# Altium PCB DashBoard.PcbDoc (part 2 of 2)
Units mm, origin at the board's own origin, x right, y up, seen from the top; angles counter-clockwise.
Board outline 137.91 x 120.93 mm, 2 copper layers (Top Layer, Bottom Layer); 50 components, 83 nets, 335 pads, 92 vias.
Unrouted connection lines stored in the file: 1.
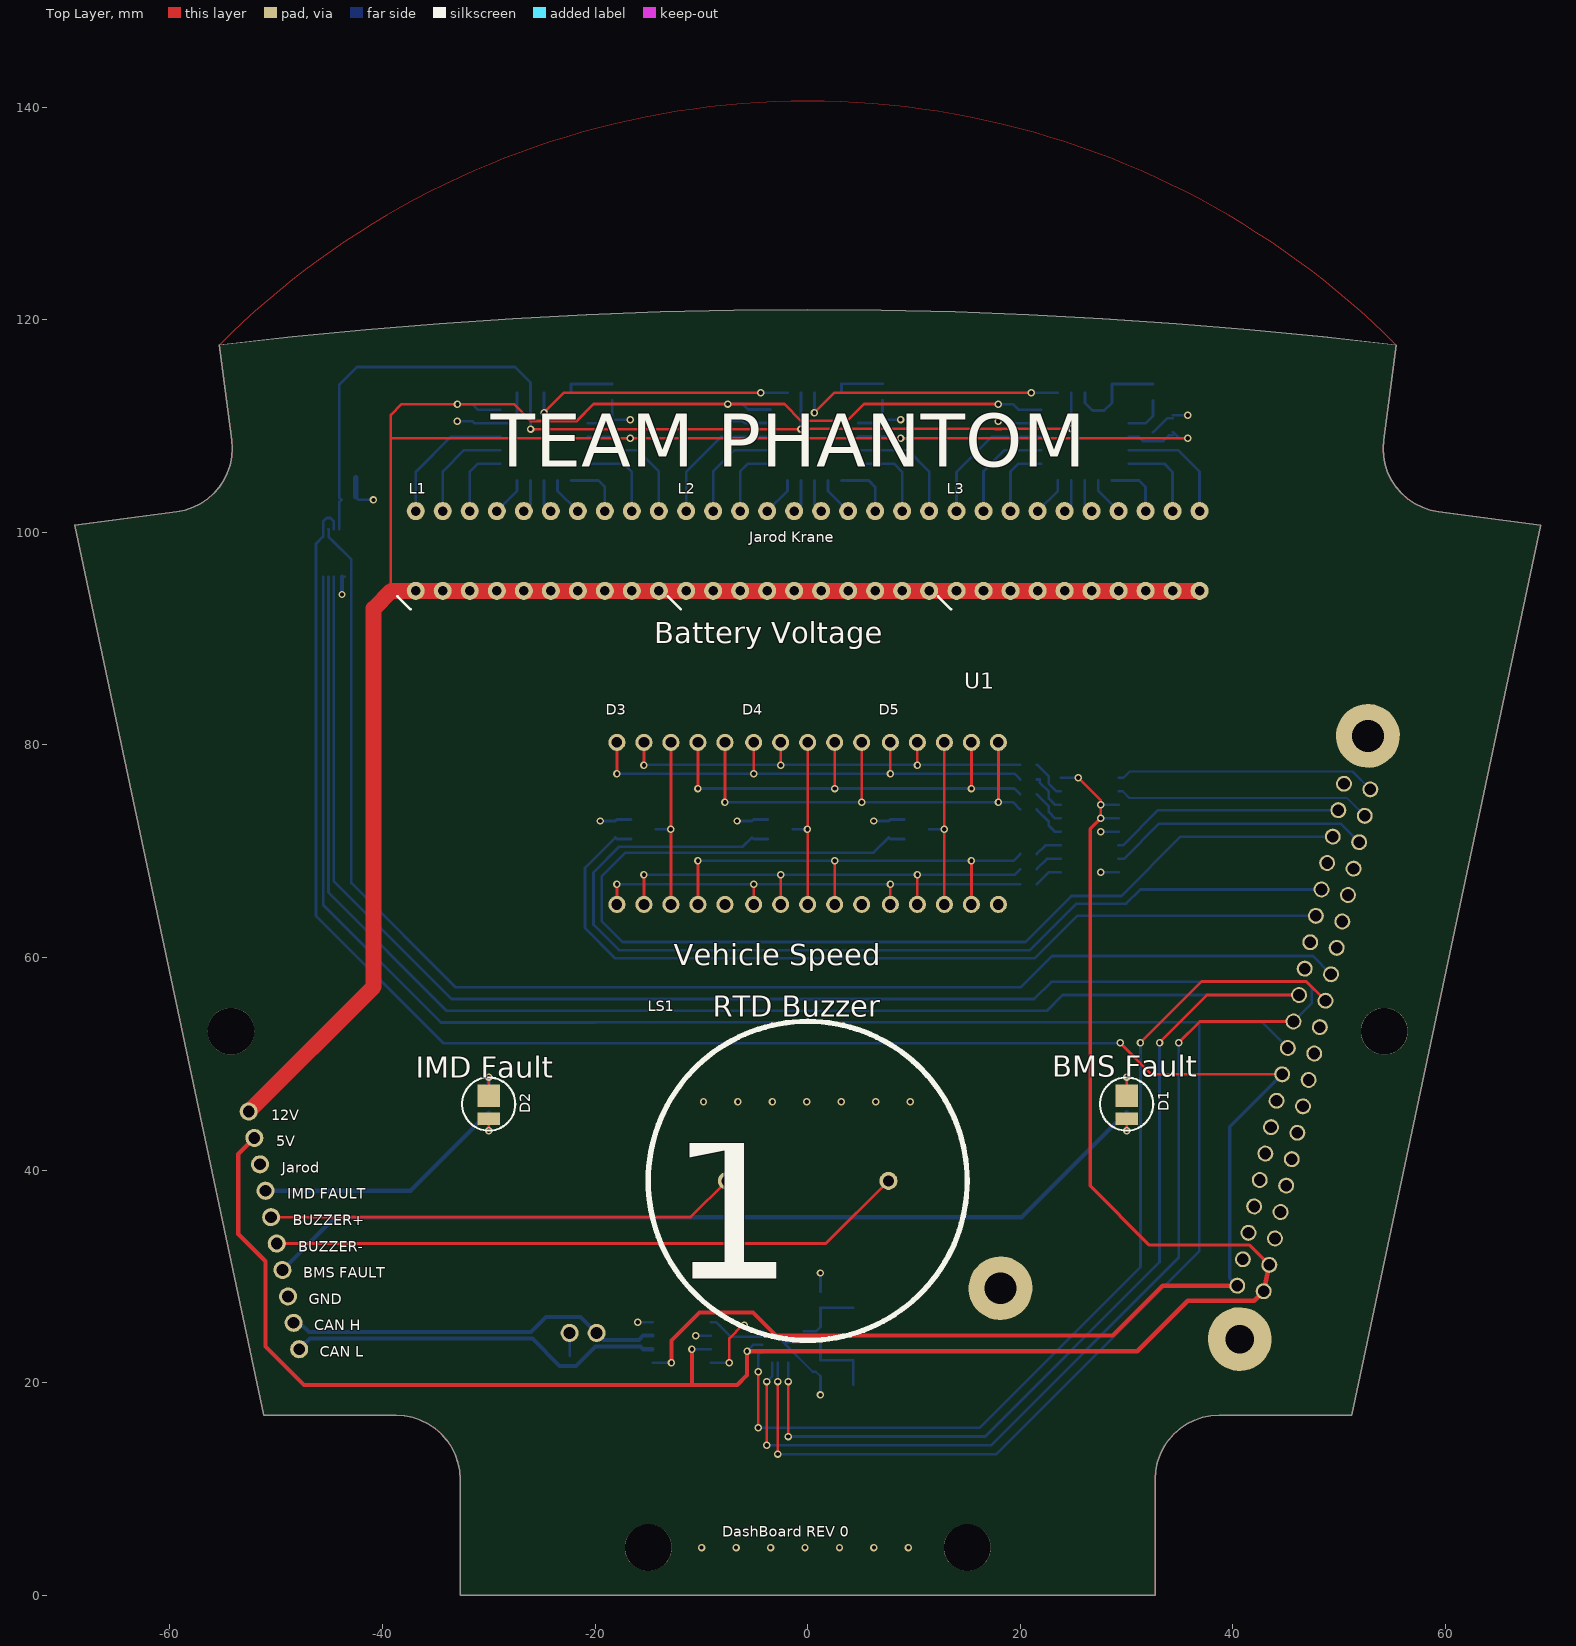
[diagram p0: Top Layer view]

## Via types
v1: diameter 0.7, hole 0.4, Top Layer to Bottom Layer, 92 vias

## Nets (pads, with @x,y where several pads share a name; then routed paths per layer and width w, separated by ;. In a path a pad name is that pad's centre, name@x,y a point inside that pad or via, vN(x,y) a via of type N, cw(c..) or ccw(c..) an arc to the next point about the centre after c; other vN are vias at no path point) (continued)
12V: (continued)
  other v1: -9.975,4.506 -6.733,4.506 -3.492,4.506 -0.25,4.506 2.992,4.506 6.233,4.506 9.475,4.506 -9.8,46.45 -6.558,46.45 -3.317,46.45 -0.075,46.45 3.167,46.45 6.408,46.45 9.65,46.45 8.74,108.85
A: U1.36 U2.7 | length 24.7
  Bottom Layer w0.254: U2.7 29.74,69.29 33.05,72.6 50.122,72.6 U1.36
B: U1.40 U2.1 | length 24.6
  Bottom Layer w0.2: U2.1 29.71,76.91 30.3,77.5 51.247,77.5 U1.40
BMS_FLT: J1.7 R11.1 | length 85.6
  Bottom Layer w0.4: J1.7 -44.45,35.575 20.125,35.575 R11.1
BUZZER: J1.5 LS1.1 | length 44.3
  Top Layer w0.254: J1.5 -11.013,35.587 LS1.1
BUZZER-: J1.6 LS1.2 | length 60
  Top Layer w0.254: J1.6 1.703,33.103 LS1.2
C: U1.38 U2.2 | length 24.1
  Bottom Layer w0.2: U2.2 29.635,75.64 30.275,75 50.734,75 U1.38
CAN_N: J1.10 R23.1 U4.6 | length 35.6
  Bottom Layer w0.381: J1.10 -46.823,24.164 -25.889,24.164 -23.325,21.6 -21.78,21.6 R23.1 -19.975,23.405 -15.731,23.405 -15.491,23.165 U4.6
CAN_P: J1.9 JP1.1 U4.7 | length 35.8
  Bottom Layer w0.381: J1.9 -47.774,25.649 -46.924,24.799 -26.001,24.799 -24.6,26.2 -21.35,26.2 JP1.1 -19.191,24.04 -15.885,24.04 -15.491,24.435 U4.7
CAN_RX: U3.20 U4.4 | length 8
  Top Layer w0.254: v1(-7.365,21.895) -7.365,24.185 -6.125,25.425 v1(-5.975,25.425)
  Bottom Layer w0.254: U4.4 v1(-7.365,21.895) ; v1(-5.975,25.425) v1(-5.975,25.425) -6.051,25.351 -5.55,24.85 U3.20
CAN_TX: U3.19 U4.1 | length 5.4
  Bottom Layer w0.254: U4.1 -8.605,25.705 -7.25,24.35 U3.19
CONTROL: C3.2 R24.2 U5.4 U6.5 U7.5 U8.5 | length 95.4
  Top Layer w0.254: v1(-26.065,109.706) v1(-0.635,109.706) -0.635,109.731 17.616,109.731 17.628,109.719 18.233,109.719 18.245,109.731 v1(24.805,109.731)
  Bottom Layer w0.254: U5.4 -44.07,102.83 C3.2 -44.07,103.27 R24.2 -44.07,113.855 -42.375,115.55 -27.54,115.55 -26.065,114.075 U6.5 v1(-26.065,109.706) v1@-26.065,109.63 ; v1(-0.635,109.706) U7.5 ; v1@24.805,109.63 v1(24.805,109.731) U8.5
CS_1: U1.24 U3.16 | length 91.2
  Top Layer w0.254: v1(-4.65,15.775) v1(-4.65,21.05) ; v1(31.3,52) 37.05,57.75 46.896,57.75 U1.24
  Bottom Layer w0.254: v1(-4.65,15.775) 16.175,15.775 31.3,30.9 v1(31.3,52) ; v1(-4.65,21.05) -4.65,22.7 -4.5,22.85 U3.16
CS_2: U1.26 U5.2 | length 132.3
  Bottom Layer w0.254: U5.2 -45.047,100.252 -45.047,99.552 -44.768,99.273 -44.764,99.273 -42.925,97.434 -42.925,67.025 -33.1,57.2 20.025,57.2 22.975,60.15 47.509,60.15 U1.26
D: U1.37 U2.6 | length 22
  Bottom Layer w0.254: U2.6 29.665,70.56 32.97,73.865 U1.37
GND: C1.1 C2.1 C3.1 C4.1 C5.1 C6.1 C7.1 C8.1 C9.1 D1.2 D2.2 J1.3 J1.8 Q6.3 Q7.3 Q8.3 R20.1 R21.1 R22.1 R24.1 R25.1 R26.1 R28.1 U1.6 U1.9 U1.14 U1.20 U1.25 U1.30 U1.34 U1.39 U2.5 U2.8 U3.8 U3.21 U4.2 U4.8 U5.6 U5.7 U6.2 U6.4 U6.10 U7.2 U7.10 U8.2 | length 64.9
  Top Layer w0.254: v1(-30,43.715) D2.2 ; v1(30,43.715) D1.2
  Bottom Layer w0.2: U3.21 0.475,21.05 0.775,21.05 C2.1
  Bottom Layer w0.254: -43.8,95.825 U5.6 ; C3.1@-42.52,103.32 C3.1 ; C3.1@-42.24,103.05 v1(-40.845,103.05) ; v1(-32.95,110.45) C5.1 ; C5.1@-31.545,110.45 -31.365,110.27 U6.2 -27.79,110.27 -27.335,110.725 U6.4 ; U6.10 -18.385,110.27 R25.1 ; v1(-19.5,72.85) R20.1@-18.105,72.85 ; R20.1 -17.955,72.99 Q6.3 ; C4.1 v1(-16.69,110.595) ; v1(-15.98,25.705) U4.8@-14.585,25.705 ; v1(-10.53,24.435) U4.2@-9.135,24.435 ; v1(-7.51,110.46) C7.1 -5.935,110.28 U7.2 ; v1(-6.64,72.85) R21.1@-5.245,72.85 ; R21.1 -5.095,72.99 Q7.3 ; U3.21 U3.8 ; v1(1.2,18.865) C2.1 ; C1.1 v1(1.2,30.335) ; U7.10 7.045,110.28 R26.1 ; v1(6.22,72.85) R22.1@7.615,72.85 ; C6.1@7.345,110.6 v1(8.74,110.6) ; R22.1 7.765,72.99 Q8.3 ; v1(17.93,110.45) C9.1 19.505,110.27 U8.2 ; v1(27.575,68.02) U2.8 ; v1(27.575,71.83) U2.5 ; R28.1 33.81,110.725 C8.1@34.335,110.725 ; C8.1 v1(35.755,111.02)
  Bottom Layer w0.4: v1(-43.8,94.15) -43.8,95.825
  Bottom Layer w0.5: C3.1@-42.52,103.32 R24.1
IMD_FLT: J1.4 R12.1 | length 24
  Bottom Layer w0.4: J1.4 -37.353,38.072 R12.1
LED1: L1.20 U6.1 | length 13
  Bottom Layer w0.254: L1.20 -36.86,105.675 -33.535,109 U6.1
LED2: L1.19 U6.20 | length 10
  Bottom Layer w0.254: L1.19 -34.32,105.74 -32.33,107.73 U6.20
LED3: L1.18 U6.19 | length 6.9
  Bottom Layer w0.254: L1.18 -31.78,105.705 -31.025,106.46 U6.19
LED4: L1.17 U6.18 | length 3.7
  Bottom Layer w0.254: L1.17 -27.335,103.905 U6.18
LED5: L1.16 U6.17 | length 3.1
  Bottom Layer w0.254: L1.16 -26.065,102.635 U6.17
LED6: L1.15 U6.16 | length 3.1
  Bottom Layer w0.254: U6.16 -24.795,102.635 L1.15
LED7: L1.14 U6.15 | length 3.7
  Bottom Layer w0.254: U6.15 -23.525,103.905 L1.14
LED8: L1.13 U6.14 | length 5.7
  Bottom Layer w0.254: U6.14 -19.685,104.875 -19.08,104.27 L1.13
LED9: L1.12 U6.13 | length 8.1
  Bottom Layer w0.254: U6.13 -17.32,106.46 -16.54,105.68 L1.12
LED10: L1.11 U6.12 | length 11.2
  Bottom Layer w0.254: U6.12 -16.015,107.73 -14,105.715 L1.11
LED11: L2.20 U7.1 | length 13
  Bottom Layer w0.254: L2.20 -11.43,105.675 -8.105,109 U7.1@-3.49,109
LED12: L2.19 U7.20 | length 10
  Bottom Layer w0.254: L2.19 -8.89,105.74 -6.9,107.73 U7.20@-3.49,107.73
LED13: L2.18 U7.19 | length 6.9
  Bottom Layer w0.254: L2.18 -6.35,105.705 -5.595,106.46 U7.19@-3.49,106.46
LED14: L2.17 U7.18 | length 3.7
  Bottom Layer w0.254: L2.17 -1.905,103.905 U7.18@-1.905,104.875
LED15: L2.16 U7.17 | length 3.1
  Bottom Layer w0.254: L2.16 -0.635,102.635 U7.17@-0.635,104.875
LED16: L2.15 U7.16 | length 3.1
  Bottom Layer w0.254: U7.16@0.635,104.875 0.635,102.635 L2.15
LED17: L2.14 U7.15 | length 3.7
  Bottom Layer w0.254: U7.15@1.905,104.875 1.905,103.905 L2.14
LED18: L2.13 U7.14 | length 5.7
  Bottom Layer w0.254: U7.14@3.175,104.875 5.745,104.875 6.35,104.27 L2.13
LED19: L2.12 U7.13 | length 8.1
  Bottom Layer w0.254: U7.13@4.76,106.46 8.11,106.46 8.89,105.68 L2.12
LED20: L2.11 U7.12 | length 11.2
  Bottom Layer w0.254: U7.12@4.76,107.73 9.415,107.73 11.43,105.715 L2.11
LED21: L3.20 U8.1 | length 13
  Bottom Layer w0.254: L3.20 14,105.675 17.325,109 U8.1@21.94,109
LED22: L3.19 U8.20 | length 10
  Bottom Layer w0.254: L3.19 16.54,105.74 18.53,107.73 U8.20@21.94,107.73
LED23: L3.18 U8.19 | length 6.9
  Bottom Layer w0.254: L3.18 19.08,105.705 19.835,106.46 U8.19@21.94,106.46
LED24: L3.17 U8.18 | length 3.7
  Bottom Layer w0.254: L3.17 23.525,103.905 U8.18@23.525,104.875
LED25: L3.16 U8.17 | length 3.1
  Bottom Layer w0.254: L3.16 24.795,102.635 U8.17@24.795,104.875
LED26: L3.15 U8.16 | length 3.1
  Bottom Layer w0.254: U8.16@26.065,104.875 26.065,102.635 L3.15
LED27: L3.14 U8.15 | length 3.7
  Bottom Layer w0.254: U8.15@27.335,104.875 27.335,103.905 L3.14
LED28: L3.13 U8.14 | length 5.7
  Bottom Layer w0.254: U8.14@28.605,104.875 31.175,104.875 31.78,104.27 L3.13
LED29: L3.12 U8.13 | length 8.1
  Bottom Layer w0.254: U8.13@30.19,106.46 33.54,106.46 34.32,105.68 L3.12
LED30: L3.11 U8.12 | length 11.2
  Bottom Layer w0.254: U8.12@30.19,107.73 34.845,107.73 36.86,105.715 L3.11
LED-1: Q6.1 R20.2 U1.29 | length 82.8
  Bottom Layer w0.254: Q6.1 -17.955,71.16 R20.2 -20.95,68.445 -20.95,62.775 -18.1,59.925 21.35,59.925 25.352,63.927 U1.29
LED-2: Q7.1 R21.2 U1.31 | length 94.5
  Bottom Layer w0.254: Q7.1 -5.095,71.16 R21.2 -6.11,70.425 -17.725,70.425 -20.15,68 -20.15,63.1 -17.75,60.7 20.9,60.7 25.275,65.075 29.95,65.075 31.286,66.411 U1.31
LED-3: Q8.1 R22.2 U1.35 | length 107.9
  Bottom Layer w0.254: Q8.1 7.765,71.16 R22.2 6.2,69.875 -17.125,69.875 -19.375,67.625 -19.375,63.425 -17.425,61.475 20.475,61.475 24.8,65.8 29.5,65.8 35.08,71.38 U1.35
LED-A: D3.7 D4.7 D5.7 R13.2 | length 43.6
  Top Layer w0.254: v1(-10.32,75.9) D3.7 ; v1(2.54,75.9) D4.7 ; v1(15.4,75.9) D5.7
  Bottom Layer w0.254: v1(-10.32,75.9) v1(2.54,75.9) v1(15.4,75.9) 19.455,75.9 R13.2
LED-B: D3.6 D4.6 D5.6 R14.2 | length 45
  Top Layer w0.254: v1(-7.78,74.6) D3.6 ; v1(5.08,74.6) D4.6 ; v1(17.94,74.6) D5.6
  Bottom Layer w0.254: v1(-7.78,74.6) v1(5.08,74.6) v1(17.94,74.6) 19.341,74.6 19.991,73.95 R14.2
LED-C: D3.4 D4.4 D5.4 R15.2 | length 42.9
  Top Layer w0.254: D3.4 v1(-10.32,69.1) ; D4.4 v1(2.54,69.1) ; D5.4 v1(15.4,69.1)
  Bottom Layer w0.254: v1(-10.32,69.1) v1(2.54,69.1) v1(15.4,69.1) 19.365,69.1 R15.2
LED-D: D3.2 D4.2 D5.2 R16.2 | length 44
  Top Layer w0.254: D3.2 v1(-15.4,67.8) ; D4.2 v1(-2.54,67.8) ; D5.2 v1(10.32,67.8)
  Bottom Layer w0.254: v1(-15.4,67.8) v1(-2.54,67.8) v1(10.32,67.8) 19.49,67.8 R16.2
LED-E: D3.1 D4.1 D5.1 R17.2 | length 43.6
  Top Layer w0.254: D3.1 v1(-17.94,66.9) ; D4.1 v1(-5.08,66.9) ; D5.1 v1(7.78,66.9)
  Bottom Layer w0.254: v1@-17.94,66.89 -5.08,66.89 7.78,66.89 R17.2
LED-F: D3.9 D4.9 D5.9 R18.2 | length 41.8
  Top Layer w0.254: v1(-15.4,78.1) D3.9 ; v1(-2.54,78.1) D4.9 ; v1(10.32,78.1) D5.9
  Bottom Layer w0.254: v1@-15.4,78.15 -2.54,78.15 10.32,78.15 R18.2
LED-G: D3.10 D4.10 D5.10 R19.2 | length 47
  Top Layer w0.254: v1(-17.94,77.3) D3.10 ; v1(-5.08,77.3) D4.10 ; v1(7.78,77.3) D5.10
  Bottom Layer w0.254: v1(-17.94,77.3) v1(-5.08,77.3) v1(7.78,77.3) 19.455,77.3 R19.2
NetD1_1: D1.1 R11.2 | length 3.5
  Top Layer w0.254: D1.1 v1(30,48.76)
  Bottom Layer w0.254: R11.2 v1(30,48.76)
NetD2_1: D2.1 R12.2 | length 3.5
  Top Layer w0.254: D2.1 v1(-30,48.76)
  Bottom Layer w0.4: R12.2 v1(-30,48.76)
NetD3_3: D3.3 D3.8 Q6.2 | length 16.6
  Top Layer w0.254: D3.3 D3.8
  Bottom Layer w0.254: Q6.2 v1(-12.88,72.075)
NetD4_3: D4.3 D4.8 Q7.2 | length 16.6
  Top Layer w0.254: D4.3 D4.8
  Bottom Layer w0.254: Q7.2 v1(-0.02,72.075)
NetD5_3: D5.3 D5.8 Q8.2 | length 16.6
  Top Layer w0.254: D5.3 D5.8
  Bottom Layer w0.254: Q8.2 v1(12.84,72.075)
NetJP1_2: JP1.2 R23.2 | length 2.2
  Bottom Layer w0.254: R23.2 JP1.2
NetR13_1: R13.1 U2.13 | length 3.5
  Bottom Layer w0.254: R13.1@21.541,75.35 R13.1 22.685,74.22 22.685,73.681 23.266,73.1 U2.13
NetR14_1: R14.1 U2.12 | length 3.3
  Bottom Layer w0.254: R14.1@21.541,73.95 22.666,72.825 22.666,72.449 23.285,71.83 U2.12
NetR15_1: R15.1 U2.11 | length 2.6
  Bottom Layer w0.254: R15.1@21.541,69.74 22.361,70.56 U2.11
NetR16_1: R16.1 U2.10 | length 2.7
  Bottom Layer w0.254: R16.1@21.541,68.315 22.516,69.29 U2.10
NetR17_1: R17.1 U2.9 | length 2.7
  Bottom Layer w0.254: R17.1@21.541,66.89 22.671,68.02 U2.9
NetR18_1: R18.1 U2.15 | length 3.7
  Bottom Layer w0.254: R18.1@21.541,78.15 R18.1 22.685,77.02 22.685,76.338 23.383,75.64 U2.15
NetR19_1: R19.1 U2.14 | length 3.8
  Bottom Layer w0.254: R19.1@21.541,76.75 21.816,76.75 21.816,76.489 22.685,75.62 22.685,74.97 23.285,74.37 U2.14
NetR25_2: R25.2 U6.8 | length 4.7
  Bottom Layer w0.254: U6.8 -22.255,113.95 R25.2
NetR26_2: R26.2 U7.8 | length 4.7
  Bottom Layer w0.254: U7.8 3.175,113.96 R26.2
NetR27_1: R27.1 R28.2 U8.10 | length 4
  Bottom Layer w0.254: U8.10 31.805,110.27 R28.2 R27.1
NetR27_2: R27.2 U8.6 U8.8 | length 9.7
  Bottom Layer w0.254: U8.6 26.075,112.16 26.785,111.45 27.885,111.45 28.615,112.18 U8.8 28.615,113.95 R27.2@32.485,113.95
NetU6_6: U6.6 U7.4 | length 25.5
  Top Layer w0.254: v1(-24.795,111.25) -22.91,113.135 v1(-4.42,113.135)
  Bottom Layer w0.254: v1(-24.795,111.25) U6.6 ; v1(-4.42,113.135) U7.4
NetU7_6: U7.6 U8.4 | length 25.6
  Top Layer w0.254: v1(0.635,111.25) 2.52,113.135 v1@21.01,113.135
  Bottom Layer w0.254: v1(0.635,111.25) U7.6 ; v1(21.02,113.125) U8.4
OSC1: C2.2 U3.7 Y1.2 | length 8.9
  Bottom Layer w0.254: U3.7 0.8,24.35 1.2,23.95 C2.2 4.3,22.125 Y1.2
OSC2: C1.2 U3.6 Y1.1 | length 6.7
  Bottom Layer w0.254: U3.6 0.8,24.85 1.2,25.25 C1.2 Y1.1@4.3,27.075
SCK: U1.23 U3.12 U5.9 | length 210.8
  Top Layer w0.254: v1(-1.825,14.95) -1.825,14.8 v1(-1.825,20.125) ; v1@33.1,52.025 37.548,56.473 U1.23
  Bottom Layer w0.254: U5.9 -45.07,66.12 -33.95,55 22.5,55 23.973,56.473 U1.23 ; v1(-1.825,14.95) 16.675,14.95 ; v1(-1.825,20.125) U3.12 ; 16.7,14.95 33.1,31.35 v1@33.1,52.025
  other v1: 33.1,52
SDI: U1.19 U3.14 U5.10 | length 204.9
  Top Layer w0.254: v1(-2.825,13.3) v1(-2.825,20.125)
  Bottom Layer w0.254: U5.10 -45.57,64.97 -34.5,53.9 -19.9,53.9 -19.875,53.925 36.825,53.925 ; v1(-2.825,13.3) 17.75,13.3 36.825,32.375 36.825,53.925 ; v1(-2.825,20.125) U3.14 ; U1.19 42.739,53.925 36.825,53.925
SDO: U1.21 U3.15 U5.8 | length 215.9
  Top Layer w0.254: v1(-3.85,14.125) -3.85,15.081 v1(-3.85,20.125) ; v1(34.9,52) 36.889,53.989 U1.21
  Bottom Layer w0.254: U5.8 -44.57,67.17 -33.5,56.1 21.3,56.1 22.925,57.725 46.9,57.725 47.4,57.225 47.4,55.701 U1.21 ; v1(-3.85,14.125) 17.225,14.125 34.9,31.8 v1(34.9,52) ; v1(-3.85,20.125) -3.85,20.134 -3.325,20.659 U3.15
pads on no net: D3.5 D4.5 D5.5 U1.0 U1.3 U1.5 U1.7 U1.8 U1.10 U1.11 U1.12 U1.13 U1.15 U1.16 U1.18 U1.22 U1.27 U1.28 U1.32 U1.33 U3.1 U3.2 U3.3 U3.4 U3.5 U3.9 U3.10 U3.11 U3.13 U5.5 U6.7 U6.9 U7.7 U7.9 U8.7 U8.9

## Polygon pours and split planes (outlines as drawn)
12V on Bottom Layer "Bottom Layer-No Net" (solid, remove dead copper, shelved, pour order 0): -51.163,16.954 -38.695,16.954 cw(c-38.695,10.955) -32.695,10.954 -32.695,0.006 32.695,0.006 32.695,10.955 cw(c38.695,10.955) 38.695,16.954 51.163,16.954 68.954,100.654 60.575,101.769 59.318,101.948 cw(c60.108,107.884) 54.173,108.674 54.632,112.125 55.363,117.618 ccw(c0,62.255) -55.363,117.618 -54.23,109.1 -54.173,108.674 cw(c-60.12,107.883) -59.329,101.935 -62.775,101.477 -68.954,100.654
GND on Top Layer "Bottom Layer-No Net" (solid, remove dead copper, shelved, pour order 2): -51.163,16.954 -38.695,16.954 cw(c-38.695,10.955) -32.695,10.954 -32.695,0.006 32.695,0.006 32.695,10.955 cw(c38.695,10.955) 38.695,16.954 51.163,16.954 68.954,100.654 60.575,101.769 59.318,101.948 cw(c60.108,107.884) 54.173,108.674 54.632,112.125 55.363,117.618 ccw(c0,62.255) -55.363,117.618 -54.23,109.1 -54.173,108.674 cw(c-60.12,107.883) -59.329,101.935 -62.775,101.477 -68.954,100.654

## Other copper
Top Layer:
  pour cut-out: 2.068,32.375 5.575,32.375 5.575,16.75 2.032,16.75
  pour cut-out: -55.363,117.618 -50.7,118.143 -42.425,118.983 -36.312,119.5 -30.025,119.949 -23.525,120.323 -18.3,120.56 -12.475,120.756 -7.625,120.865 -1.775,120.919 2.925,120.911 7.875,120.86 13.675,120.73 19.125,120.529 24.325,120.281 30.003,119.95 35.25,119.588 40.425,119.161 45.331,118.7 49.825,118.241 55.363,117.618 55.375,145.125 -55.8,143.45
Bottom Layer:
  pour cut-out: 29.975,75 29.975,66.636 31.275,67.75
  pour cut-out: -17.94,66.9 -17.9,65.3 -19.375,65.225
  pour cut-out: -7.78,74.6 -10.32,75.9 -12.225,77.349 -9.3,77.375
  pour cut-out: 18.525,57 20.213,56.15 20.213,57.288 22.8,59.875 22.925,60.252 22.527,61.002
  pour cut-out: 21.425,56.216 21.424,56.215 21.424,55.05 20.808,55.05 20.65,54.892
  pour cut-out: 2.093,32.4 5.6,32.4 5.6,16.775 2.057,16.775
  pour cut-out: -44.433,95.175 -43,95.175 -43,94.925 -44.433,94.925
  pour cut-out: -55.363,117.618 -50.7,118.143 -42.425,118.983 -36.312,119.5 -30.025,119.949 -23.525,120.323 -18.3,120.56 -12.475,120.756 -7.625,120.865 -1.775,120.919 2.925,120.911 7.875,120.86 13.675,120.73 19.125,120.529 24.325,120.281 30.003,119.95 35.25,119.588 40.425,119.161 45.331,118.7 49.825,118.241 55.363,117.618 55.375,145.125 -55.8,143.45

## Silkscreen, mask and mechanical layers (free items; w line width, h text height)
Top Overlay:
  circle w0.2: c30,46.225 r2.5
  circle w0.2: c-30,46.225 r2.5
  text "TEAM PHANTOM" at -29.825,106.175 h5
  text "Jarod Krane" at -5.492,99.05 h1
  text "Battery Voltage" at -14.45,89.576 h2
  text "Vehicle Speed" at -12.6,59.275 h2
  text "RTD Buzzer" at -8.95,54.425 h2
  text "BMS Fault" at 23.025,48.775 h2
  text "IMD Fault" at -36.85,48.7 h2
  text "12V" at -50.475,44.713 h1
  text "5V" at -49.967,42.241 h1
  text "Jarod" at -49.458,39.769 h1
  text "IMD FAULT" at -48.95,37.297 h1
  text "BUZZER+" at -48.442,34.825 h1
  text "BUZZER-" at -47.933,32.353 h1
  text "BMS FAULT" at -47.425,29.881 h1
  text "GND" at -46.917,27.409 h1
  text "CAN H" at -46.408,24.937 h1
  text "1" at -13.15,24.125 h30
  text "CAN L" at -45.9,22.465 h1
  text "DashBoard REV 0" at -8.025,5.525 h1
Bottom Overlay:
  text "12V" at -46.85,44.713 h1
  text "5V" at -47.164,42.241 h1
  text "Jarod" at -43.646,39.769 h1
  text "IMD FAULT" at -39.217,37.297 h1
  text "BUZZER+" at -40.607,34.825 h1
  text "BUZZER-" at -40.088,32.353 h1
  text "BMS FAULT" at -37.183,29.881 h1
  text "GND" at -43.048,27.409 h1
  text "CAN H" at -40.211,24.937 h1
  text "CAN L" at -39.975,22.465 h1
  text "z" at 7.55,0.35 h3.5
Board:
  lines w0.2: -68.986,100.65 -51.196,16.954 -38.695,16.954 -37.912,16.903 -37.142,16.75 -36.399,16.498 -35.695,16.151 -35.042,15.715 -34.452,15.197 -33.935,14.607 -33.499,13.954 -33.152,13.251 -32.899,12.507 -32.746,11.738 -32.695,10.954 -32.695,0.006 32.695,0.006 32.695,10.954 32.746,11.738 32.899,12.507 33.152,13.251 33.499,13.954 33.935,14.607 34.452,15.197 35.042,15.715 35.695,16.151 36.399,16.498 37.142,16.75 37.912,16.903 38.695,16.954 51.163,16.954 68.954,100.654 59.329,101.935 58.56,102.089 57.818,102.342 57.115,102.69 56.464,103.126 55.875,103.643 55.358,104.233 54.923,104.885 54.576,105.589 54.325,106.331 54.172,107.1 54.12,107.883 54.173,108.674 55.363,117.618 48.47,118.394 41.565,119.067 34.652,119.637 27.731,120.103 20.804,120.466 13.872,120.725 6.937,120.881 0,120.933 -6.937,120.881 -13.872,120.725 -20.804,120.466 -27.731,120.103 -34.652,119.637 -41.565,119.067 -48.47,118.394 -55.363,117.618 -54.173,108.674 -54.12,107.891 -54.171,107.108 -54.323,106.338 -54.574,105.594 -54.92,104.89 -55.355,104.237 -55.872,103.646 -56.461,103.128 -57.113,102.691 -57.817,102.343 -58.56,102.089 -59.329,101.935 -68.986,100.65